# Altium PCB oxi_dev1.PcbDoc
Units mm, origin at the board's own origin, x right, y up, seen from the top; angles counter-clockwise.
Board outline 63.63 x 57.78 mm, 2 copper layers (Top Layer, Bottom Layer); 62 components, 51 nets, 264 pads, 20 vias.
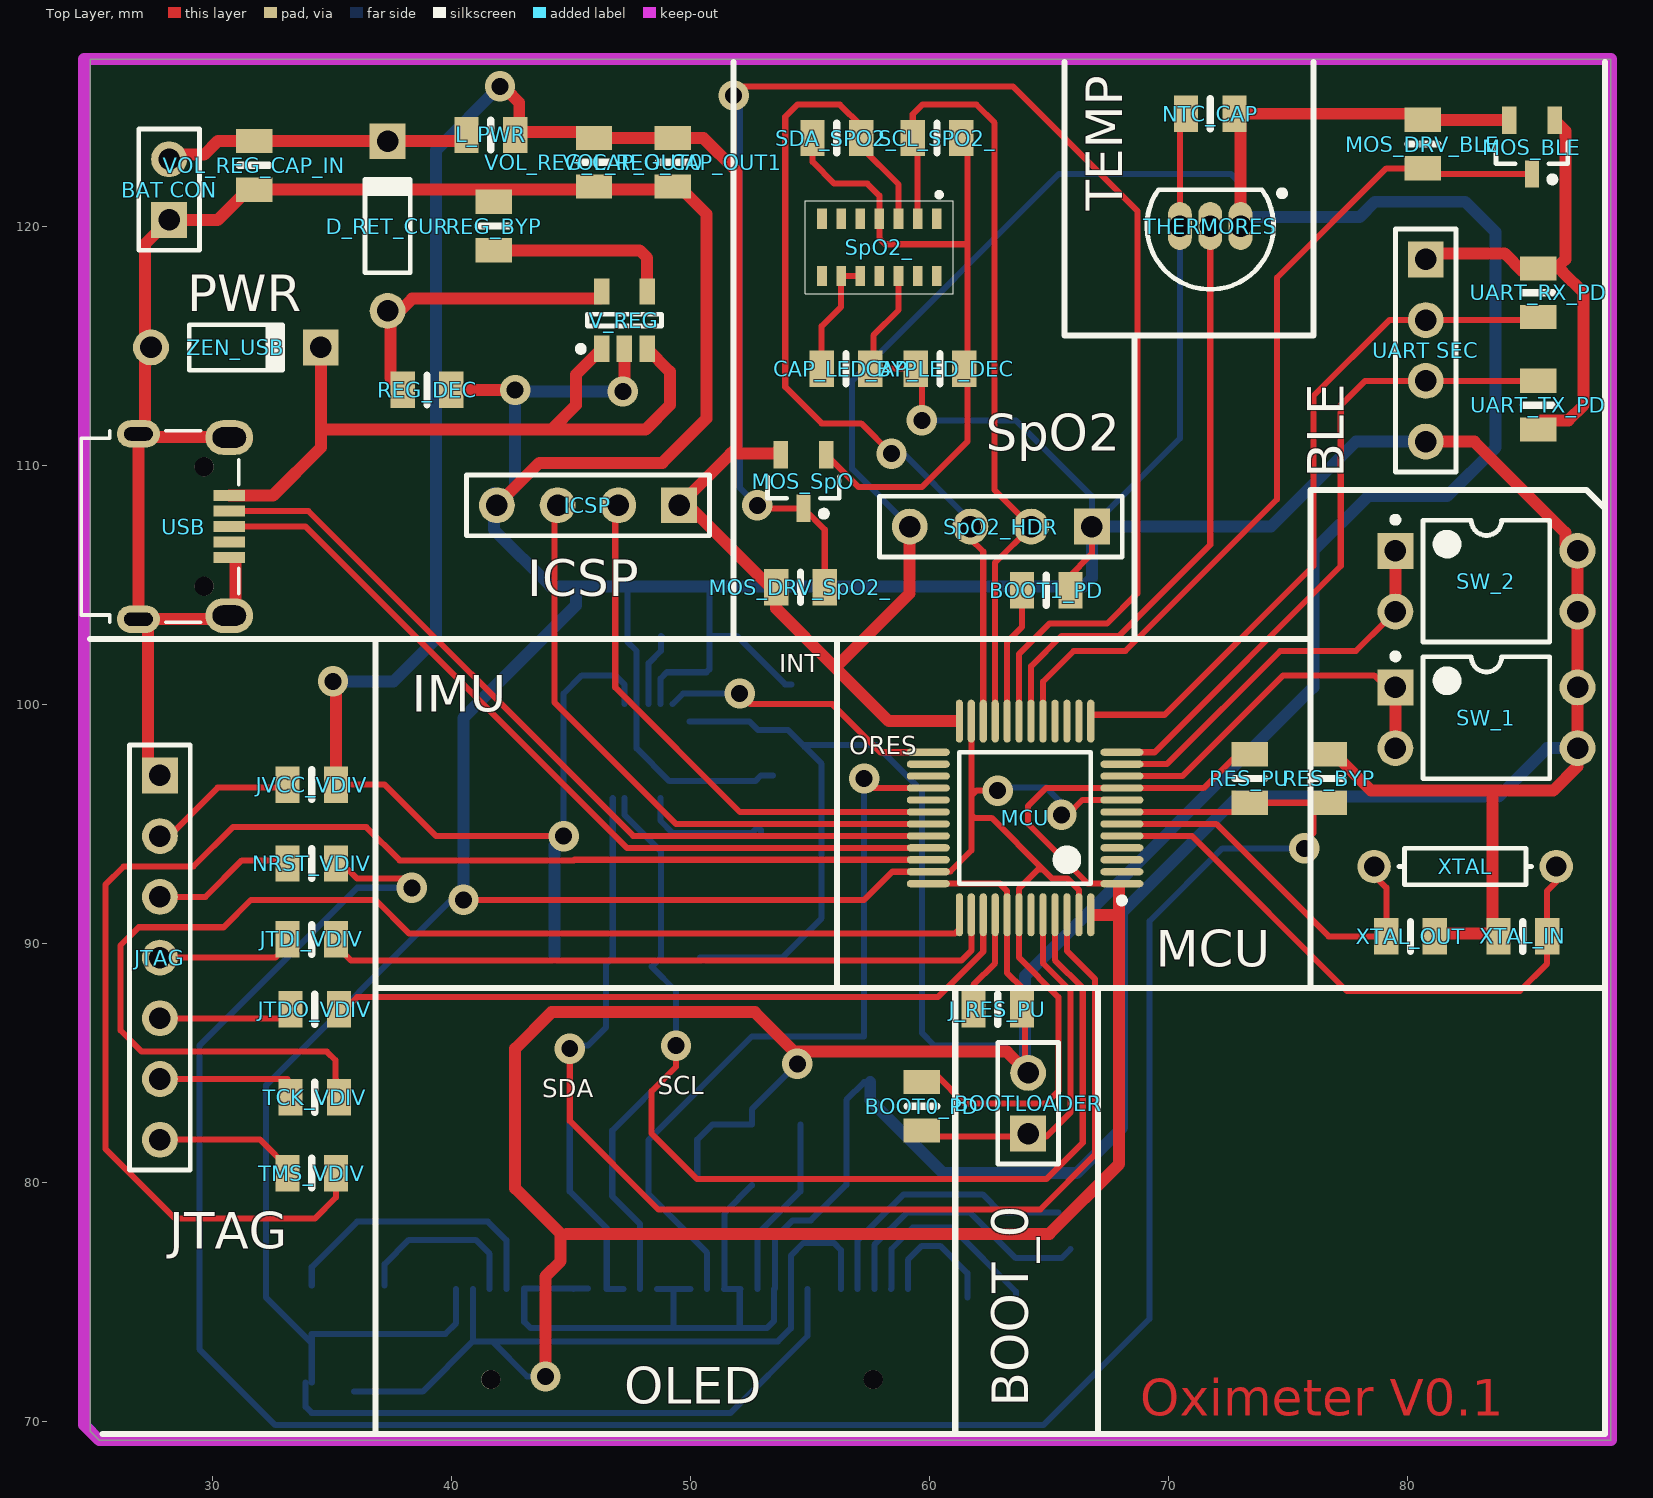
[diagram p0: Top Layer view]
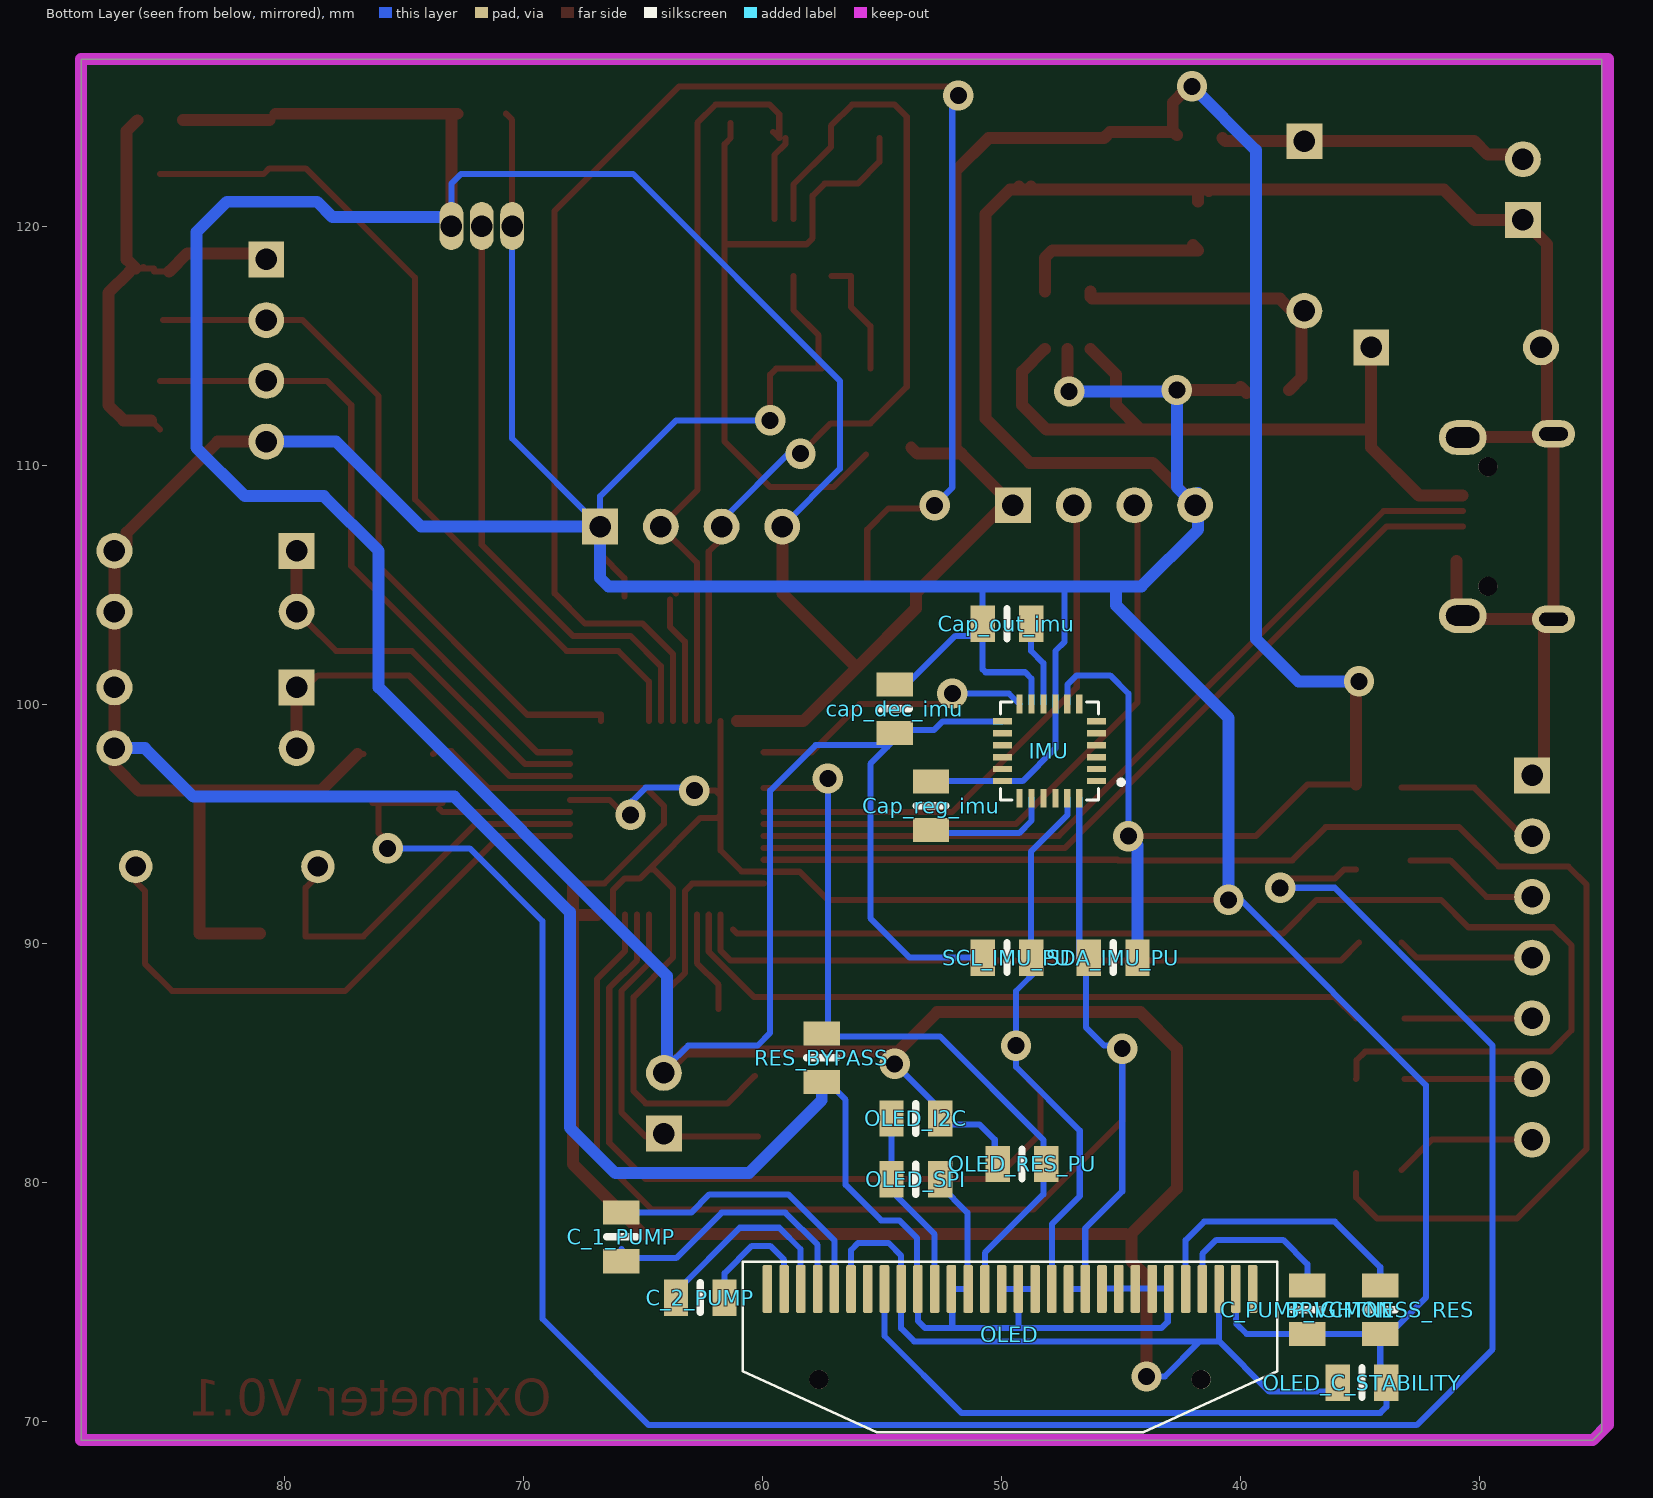
[diagram p1: Bottom Layer view, seen from below]
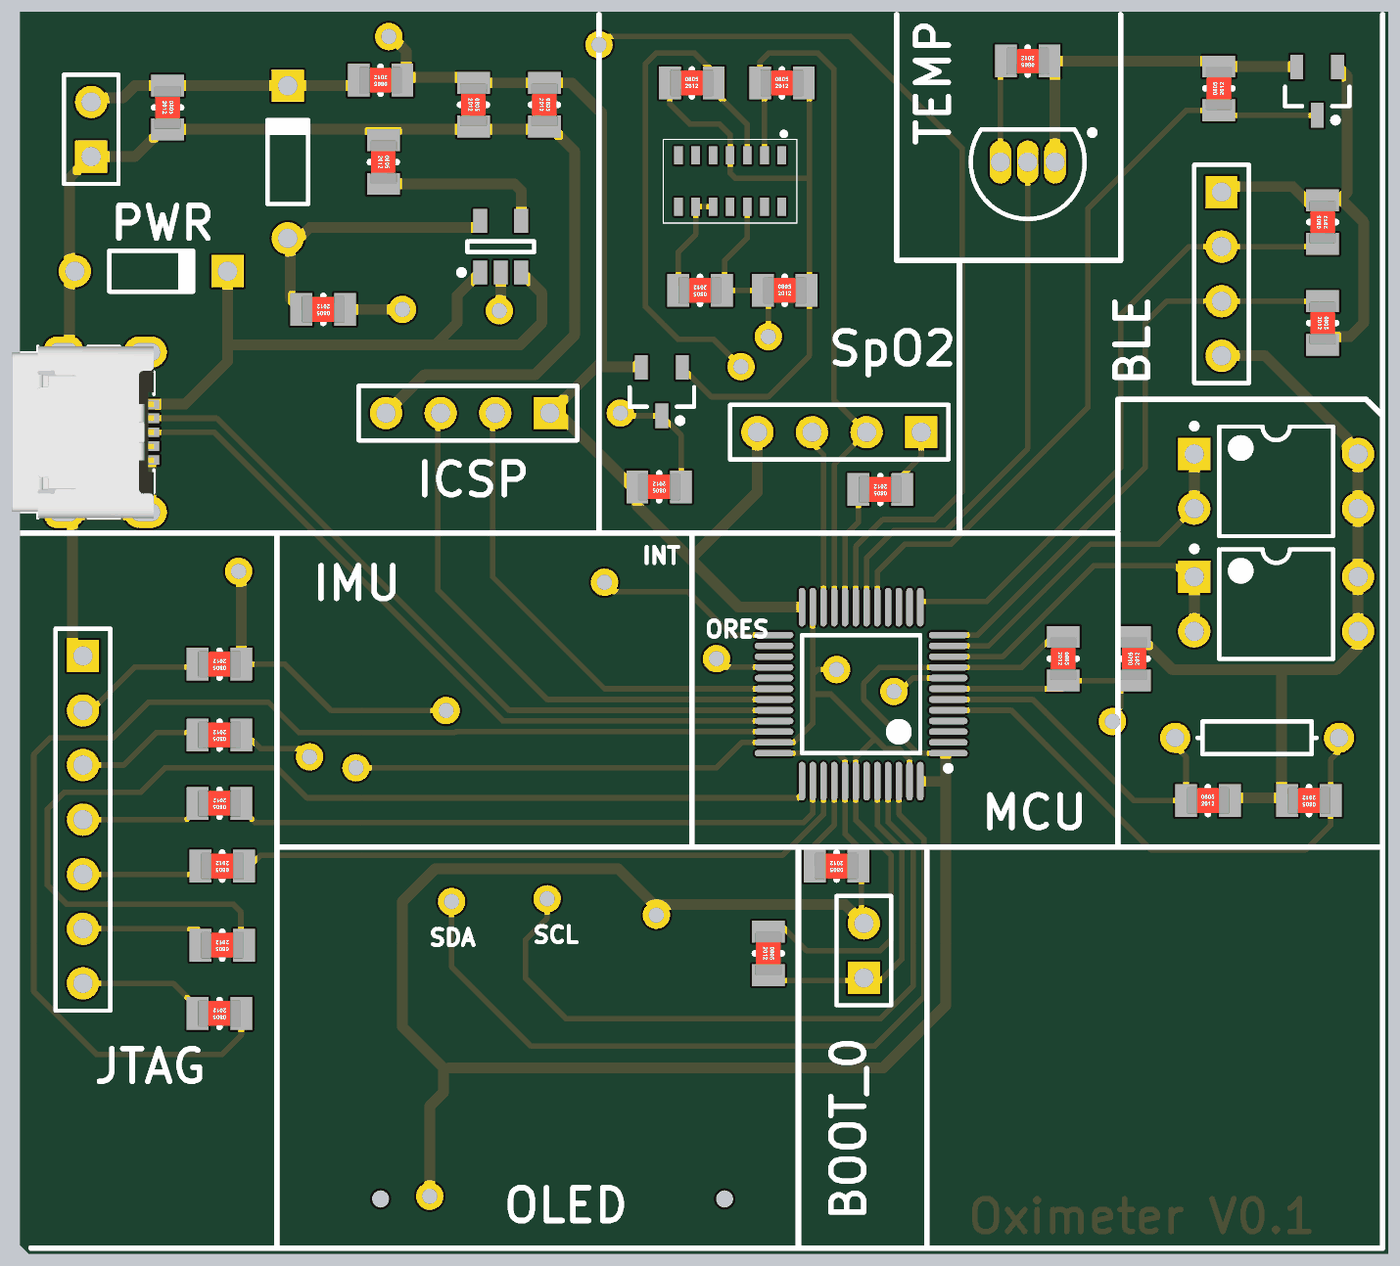
[diagram p2: 3D render of the assembled board from above, using the file's embedded part models]
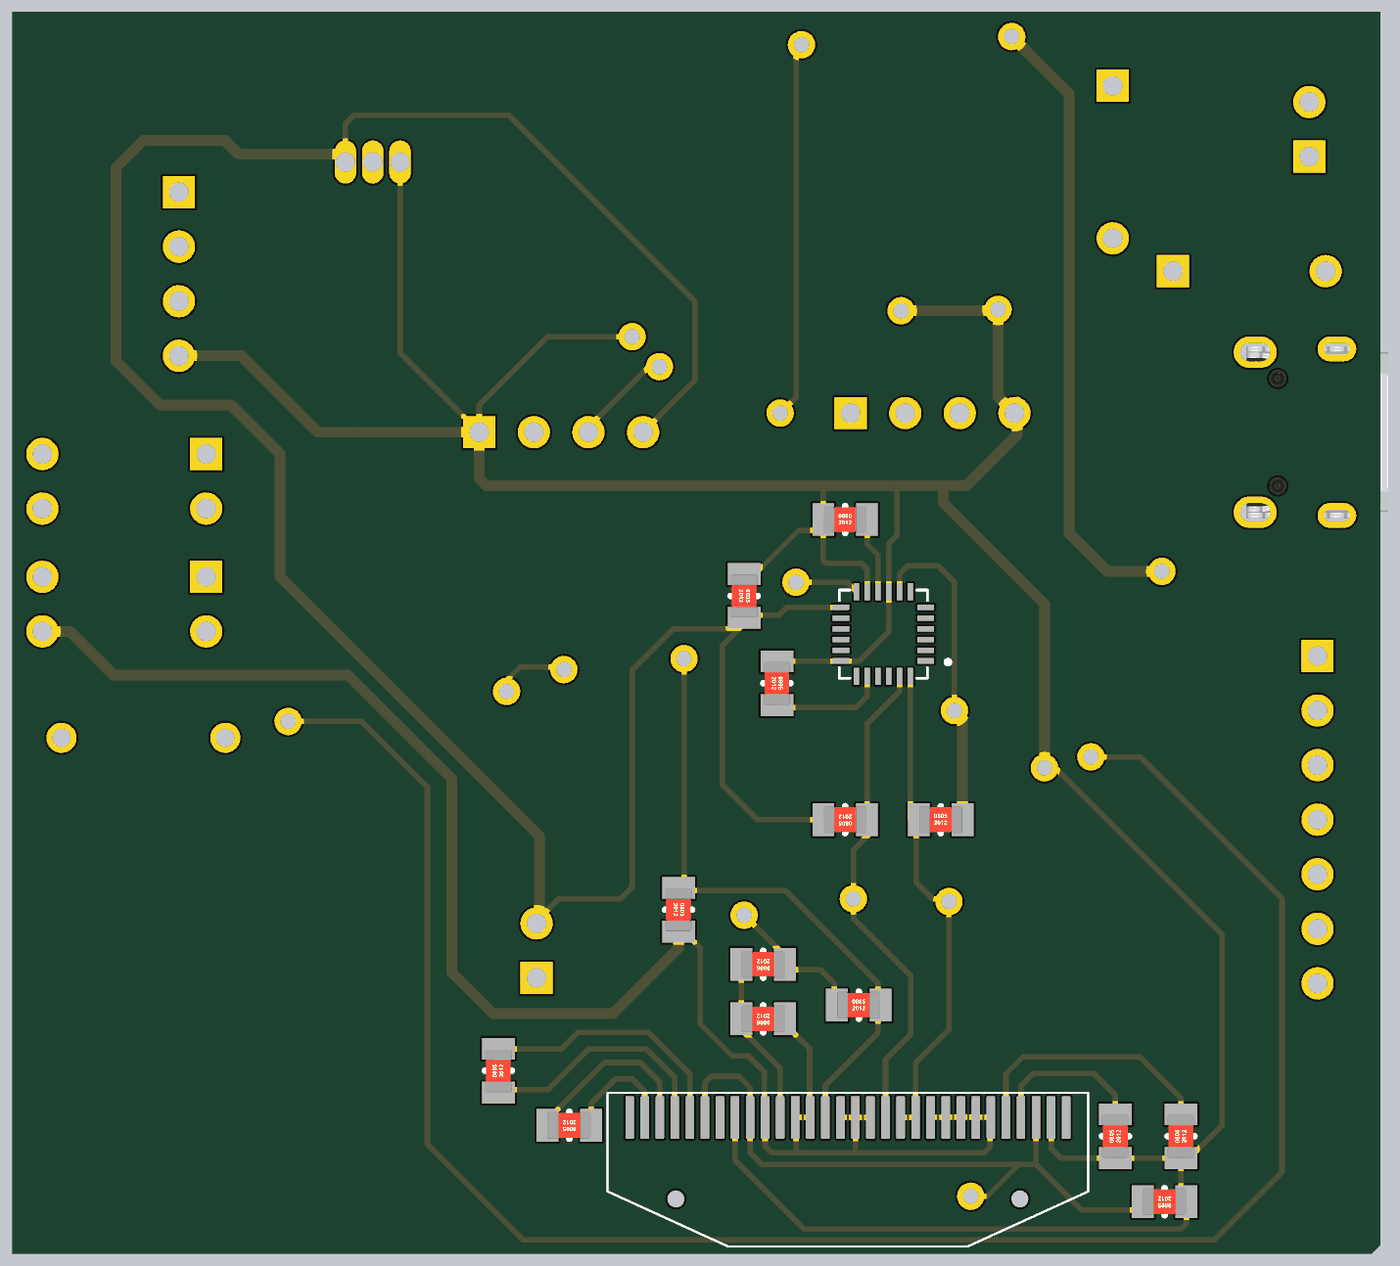
[diagram p3: 3D render of the assembled board from below, using the file's embedded part models]

## Layer stack, top to bottom
Top Solder: solder mask 0.0102, Solder Resist, Dk 3.5
Top Layer: signal copper 0.0356
Dielectric 1: dielectric 0.32, FR-4, Dk 4.8
Bottom Layer: signal copper 0.0356
Bottom Solder: solder mask 0.0102, Solder Resist, Dk 3.5

## Board outline
25.273,69.215 24.892,69.596 24.892,127 88.519,127 88.519,69.215

## Design rules (kind name [scope] priority, off if disabled: settings)
AssemblyTestPointUsage [All] p1 off:
AssemblyTestpoint [All] p1 off: testpointundercomponent=TRUE minsize=1.016 maxsize=2.54 preferedsize=1.524 minholesize=0 maxholesize=1.016 preferedholesize=0.813 testpointgrid=0.025 usegrid=TRUE gridtolerance=0 allowsidetop=TRUE allowsidebottom=TRUE
Clearance [All] p1: gap=0.254 ignorepadtopadclearanceinfootprint=FALSE except(0: Arc-Hole Track-Hole SMDPad-Hole THPad-Hole Via-Hole Fill-Hole Poly-Hole Region-Hole Text-Hole; 0.127: Arc-Arc Arc-Track Arc-SMDPad Track-Track Track-SMDPad SMDPad-SMDPad)
FabricationTestPointUsage [All] p1 off: valid=0 allowmultiple=FALSE
FabricationTestpoint [All] p1 off: side=3 testpointundercomponent=TRUE minsize=1.016 maxsize=2.54 preferedsize=1.524 minholesize=0 maxholesize=1.016 preferedholesize=0.813 testpointgrid=0.025 allowsidetop=TRUE allowsidebottom=TRUE usegrid=TRUE gridtolerance=0
HoleSize [All] p1 off: absolutevalues=TRUE maxlimit=2.54 minlimit=0.025 maxpercent=80.000 minpercent=20.000
HoleToHoleClearance [All] p1 off: gap=0.254 allowstackedmicrovias=TRUE
LayerPairs [All] p1 off: enforce=TRUE
MinimumSolderMaskSliver [All] p1 off: minsoldermaskwidth=0.254
NetAntennae [All] p1 off: netantennaetolerance=0
PolygonConnect [All] p1: connectstyle=Relief reliefconductorwidth=0.254 reliefentries=4 polygonreliefangle="90 Angle" airgapwidth=0.254
RoutingVias [All] p1: holewidth=0.711 width=1.27 viastyle="Through Hole" minholewidth=0.711 minwidth=1.27 maxholewidth=0.711 maxwidth=1.27
SilkToSilkClearance [All] p1 off: silktosilkclearance=0.254
SilkToSolderMaskClearance [IsPad] p1 off: minsilkscreentomaskgap=0.254 clearancetoexposedcopper=TRUE
SolderMaskExpansion [All] p1: expansion=0.102
Width [All] p1: maxlimit=1 minlimit=0.254 preferedwidth=0.5
19 further rules are at their usual default settings.

## Components (designator, comment, footprint, x,y, rotation, side; value= is the part's Value field where it differs from the comment)
"BAT CON" "Header 2" HDR1X2 28.194,120.269 r90 top
BOOT0_PD "10K" SMD-0805C 59.69,83.185 r180 top value=1K
BOOT1_PD "10K" SMD-0805C 64.897,104.775 r90 top value=1K
BOOTLOADER "Header 2" HDR1X2 64.135,82.042 r90 top
BRIGHTNESS_RES "Res3" SMD-0805C 34.163,74.676 r180 bottom value=390k
C_1_PUMP "Cap Semi" SMD-0805C 65.913,77.724 r180 bottom value=1uF
C_2_PUMP "Cap Semi" SMD-0805C 62.611,75.184 r90 bottom value=1uF
C_PUMP_VCMON "Cap Semi" SMD-0805C 37.211,74.676 r180 bottom value=1uF
cap_dec_imu "Cap Semi" SMD-0805C 54.483,99.822 r0 bottom value=10nF
CAP_LED_BYP "Cap Semi" SMD-0805C 56.515,114.046 r90 top value=0.1nF
CAP_LED_DEC "Cap Semi" SMD-0805C 60.452,114.046 r270 top value=10nF
Cap_out_imu "Cap Semi" SMD-0805C 49.784,103.378 r270 bottom value=0.1nF
Cap_reg_imu "Cap Semi" SMD-0805C 52.959,95.758 r0 bottom value=2.2nF
D_RET_CUR "Diode 1N4148" DO-35 37.338,120.015 r90 top
ICSP "Header 4" HDR1X4 49.53,108.331 r180 top
IMU "MPU-6050" QFN50P400X400X95-24N 48.006,98.044 r0 bottom
J_RES_PU "10k" SMD-0805C 62.865,87.249 r90 top value=1K
JTAG "Header 7" HDR1X7 27.813,97.028 r270 top
JTDI_VDIV "100" SMD-0805C 34.163,90.17 r90 top value=1K
JTDO_VDIV "100" SMD-0805C 34.29,87.249 r90 top value=1K
JVCC_VDIV "22" SMD-0805C 34.163,96.647 r90 top value=1K
L_PWR "EBLS2012-101K" SMD-0805C 41.656,123.825 r90 top
MCU "STM32F103C8T6" LQFP48_N 64.008,95.25 r180 top
MOS_BLE "FDN360P" SOT23_N 85.217,123.317 r270 top
MOS_DRV_BLE "10K" SMD-0805C 80.645,123.444 r0 top value=1K
MOS_DRV_SpO2_ "10K" SMD-0805C 54.61,104.902 r90 top value=1K
MOS_SpO "FDN360P" SOT23_N 54.737,109.329 r270 top
NRST_VDIV "100" SMD-0805C 34.163,93.345 r90 top value=1K
NTC_CAP "Cap Semi" SMD-0805C 71.755,124.714 r90 top value=10uF
OLED "OLED" OLED0.96_NO3D 59.806,75.545 r180 bottom
OLED_C_STABILITY "Cap Semi" SMD-0805C 34.925,71.628 r90 bottom value=1uF
OLED_I2C "Res3" SMD-0805C 53.594,82.677 r90 bottom value=0
OLED_RES_PU "Res3" SMD-0805C 49.149,80.772 r270 bottom value=4.7k
OLED_SPI "Res3" SMD-0805C 53.594,80.137 r90 bottom value=0
REG_BYP "1uf" SMD-0805C 41.783,120.015 r180 top
REG_DEC "2.2uf" SMD-0805C 38.989,113.157 r90 top
RES_BYP "100nF" SMD-0805C 76.708,96.901 r0 top value=100pF
RES_BYPASS "Cap Semi" SMD-0805C 57.531,85.217 r0 bottom value=10uF
RES_PU "10K" SMD-0805C 73.406,96.901 r180 top value=1K
SCL_IMU_PU "Res3" SMD-0805C 49.784,89.408 r90 bottom value=1K
SCL_SPO2_ "Res3" SMD-0805C 60.325,123.698 r270 top value=1K
SDA_IMU_PU "Res3" SMD-0805C 45.339,89.408 r270 bottom value=1K
SDA_SPO2_ "Res3" SMD-0805C 56.134,123.698 r270 top value=1K
SpO2_ "MAX30102EFD+" PSON80P330X560X165-14N 57.912,119.126 r270 top
SpO2_HDR "Header 4" HDR1X4 66.802,107.442 r180 top
SW_1 "SW DIP-2" DIP-4 83.312,99.441 r0 top
SW_2 "SW DIP-2" DIP-4 83.312,105.156 r0 top
TCK_VDIV "100" SMD-0805C 34.29,83.566 r90 top value=1K
THERMORES "MCP9700A-E/TO" TO-92-TO3 71.755,120.015 r90 top
TMS_VDIV "100" SMD-0805C 34.163,80.391 r90 top value=1K
"UART SEC" "Header 4" HDR1X4 80.772,118.618 r270 top
UART_RX_PD "Res3" SMD-0805C 85.471,117.221 r0 top value=1K
UART_TX_PD "Res3" SMD-0805C 85.471,112.522 r180 top value=1K
USB "Micro USB 2.0 Type B Receptacle" 629105150521 27.813,107.442 r270 top
V_REG "MIC5205" SOT-23-OT5_N 47.244,116.078 r90 top
VOL_REG_CAP_IN "Cap Semi" SMD-0805C 31.75,122.555 r180 top value=10uF
VOL_REG_CAP_OUT0 "Cap Semi" SMD-0805C 45.974,122.682 r180 top value=22uF
VOL_REG_CAP_OUT1 "Cap Semi" SMD-0805C 49.276,122.682 r180 top value=0.1uF
XTAL "XTAL" AXIAL-0.3 82.423,93.218 r0 top
XTAL_IN "Cap Semi" SMD-0805C 84.836,90.297 r90 top value=4.3pF
XTAL_OUT "Cap Semi" SMD-0805C 80.137,90.297 r270 top value=4.3pF
ZEN_USB "5V" DO-35 30.988,114.935 r0 top

## Footprints (in the part's own frame and the unit in brackets; to place one, negate y for a bottom-side part, rotate by r counter-clockwise, add the part's x,y. Pads: shape width x height; smd on the part's side, far side on the other; paste and mask are expansions set on the pad)
629105150521 [mm] "Micro USB 2.0 SMT Type B Horizontal 5 Contacts High Current"
  rect 0.45x1.3 smd: 1(-1.3,2.9) 2(-0.65,2.9) 3(0,2.9) 4(0.65,2.9) 5(1.3,2.9)
  round 0.8 hole 0.8 unplated: MH1(-2.5,1.85) MH2(2.5,1.85)
  oval 1.45x2 hole 0.85 slot 1.4 at 90 deg: S1(-3.725,2.9) S2(3.725,2.9)
  oval 1.15x1.8 hole 0.55 slot 1.2 at 90 deg: S3(-3.875,-0.9) S4(3.875,-0.9)
  silkscreen extent -4,-3.3 4,3.3, body extent -4,-3.3 4,3.3, height 2.75
AXIAL-0.3 [mm] "Axial Device, Thru-Hole; 2 Leads; 0.3 in Pin Spacing"
  round 1.4 hole 0.85: 1(-3.81,0) 2(3.81,0)
  silkscreen extent -2.77,-0.76 2.77,0.76
DIP-4 [mm] "DIP; 4 Leads; Row Spacing 7.62 mm; Pitch 2.54 mm"
  rect 1.5x1.5 hole 0.9: 1(-3.81,1.27)
  round 1.5 hole 0.9: 2(-3.81,-1.27) 3(3.81,-1.27) 4(3.81,1.27)
  silkscreen extent -3.93,-2.55 2.65,2.69, body extent -3.15,-2.5 3.15,2.5, height 5.6
DO-35 [mm] "Diode, Axial; Body 3.8 x 1.9 mm (LxDia. max), Lead Dia. 0.53 mm (max)"
  round 1.5 hole 0.9: 1(-3.55,0)
  rect 1.5x1.5 hole 0.9: 2(3.55,0)
  silkscreen extent -1.95,-0.95 2.05,0.95
HDR1X2 [mm] "Connector; Header; 2 Position"
  rect 1.5x1.5 hole 0.9: 1(0,0)
  round 1.5 hole 0.9: 2(2.54,0)
  silkscreen extent -1.27,-1.27 3.81,1.27
HDR1X4 [mm] "Connector; Header; 4 Position"
  rect 1.5x1.5 hole 0.9: 1(0,0)
  round 1.5 hole 0.9: 2(2.54,0) 3(5.08,0) 4(7.62,0)
  silkscreen extent -1.27,-1.27 8.89,1.27
HDR1X7 [mm] "Connector; Header; 7 Position"
  rect 1.5x1.5 hole 0.9: 1(0,0)
  round 1.5 hole 0.9: 2(2.54,0) 3(5.08,0) 4(7.62,0) 5(10.16,0) 6(12.7,0) 7(15.24,0)
  silkscreen extent -1.27,-1.27 16.51,1.27
LQFP48_N [mm] "Thin QFP, 48-Leads, Body 7x7mm, Pitch 0.5mm, IPC Medium Density"
  oval 1.8x0.3 smd: 1(-4.05,2.75) 2(-4.05,2.25) 3(-4.05,1.75) 4(-4.05,1.25) 5(-4.05,0.75) 6(-4.05,0.25) 7(-4.05,-0.25) 8(-4.05,-0.75) 9(-4.05,-1.25) 10(-4.05,-1.75) 11(-4.05,-2.25) 12(-4.05,-2.75) 25(4.05,-2.75) 26(4.05,-2.25) 27(4.05,-1.75) 28(4.05,-1.25) 29(4.05,-0.75) 30(4.05,-0.25) 31(4.05,0.25) 32(4.05,0.75) 33(4.05,1.25) 34(4.05,1.75) 35(4.05,2.25) 36(4.05,2.75)
  oval 0.3x1.8 smd: 13(-2.75,-4.05) 14(-2.25,-4.05) 15(-1.75,-4.05) 16(-1.25,-4.05) 17(-0.75,-4.05) 18(-0.25,-4.05) 19(0.25,-4.05) 20(0.75,-4.05) 21(1.25,-4.05) 22(1.75,-4.05) 23(2.25,-4.05) 24(2.75,-4.05) 37(2.75,4.05) 38(2.25,4.05) 39(1.75,4.05) 40(1.25,4.05) 41(0.75,4.05) 42(0.25,4.05) 43(-0.25,4.05) 44(-0.75,4.05) 45(-1.25,4.05) 46(-1.75,4.05) 47(-2.25,4.05) 48(-2.75,4.05)
  silkscreen extent -4.18,-2.75 2.75,3.57, body extent -3.5,-3.5 3.5,3.5, height 1.6
OLED0.96_NO3D [mm]
  round 0.8 hole 0.8 unplated: 0(2.15,-3.79) 0(18.15,-3.79)
  rrect30% 0.4x2 smd: 1(0,0) 2(0.7,0) 3(1.4,0) 4(2.1,0) 5(2.8,0) 6(3.5,0) 7(4.2,0) 8(4.9,0) 9(5.6,0) 10(6.3,0) 11(7,0) 12(7.7,0) 13(8.4,0) 14(9.1,0) 15(9.8,0) 16(10.5,0) 17(11.2,0) 18(11.9,0) 19(12.6,0) 20(13.3,0) 21(14,0) 22(14.7,0) 23(15.4,0) 24(16.1,0) 25(16.8,0) 26(17.5,0) 27(18.2,0) 28(18.9,0) 29(19.6,0) 30(20.3,0)
  silkscreen extent -1.03,-6 21.33,1.14
PSON80P330X560X165-14N [mm]
  rect 0.84x0.4 smd: 1(-1.195,2.4) 2(-1.195,1.6) 3(-1.195,0.8) 4(-1.195,0) 5(-1.195,-0.8) 6(-1.195,-1.6) 7(-1.195,-2.4) 8(1.195,-2.4) 9(1.195,-1.6) 10(1.195,-0.8) 11(1.195,0) 12(1.195,0.8) 13(1.195,1.6) 14(1.195,2.4)
  silkscreen extent -2.3,-3.1 1.95,3.1
QFN50P400X400X95-24N [mm]
  rect 0.79x0.26 smd: 1(-1.97,1.25) 2(-1.97,0.75) 3(-1.97,0.25) 4(-1.97,-0.25) 5(-1.97,-0.75) 6(-1.97,-1.25) 13(1.97,-1.25) 14(1.97,-0.75) 15(1.97,-0.25) 16(1.97,0.25) 17(1.97,0.75) 18(1.97,1.25)
  rect 0.26x0.79 smd: 7(-1.25,-1.97) 8(-0.75,-1.97) 9(-0.25,-1.97) 10(0.25,-1.97) 11(0.75,-1.97) 12(1.25,-1.97) 19(1.25,1.97) 20(0.75,1.97) 21(0.25,1.97) 22(-0.25,1.97) 23(-0.75,1.97) 24(-1.25,1.97)
  silkscreen extent -3.1,-2.05 2.05,2.05
SMD-0805C [mil]
  rect 60x40 smd: 1(0,40) 2(0,-40)
  silkscreen extent -25,0 25,0, body extent -25,-39 25,39, height 35
SOT23_N [mm] "SOT23, 3-Leads, Body 2.9x1.3mm, Pitch 0.95mm, Lead Span 2.3mm - Reverse Pinning, IPC Medium Density"
  rect 1.15x0.6 smd: 1(1.125,0) 2(-1.125,-0.95) 3(-1.125,0.95)
  silkscreen extent -0.2,-1.5 1.47,1.5, body extent -0.7,-1.5 0.7,1.5, height 1.1
SOT-23-OT5_N [mm] "SOT23, 5-Leads, Body 2.9x1.6mm, Pitch 0.95mm, Lead Span 2.7mm, IPC Medium Density"
  rect 1.1x0.65 smd: 1(-1.2,0.95) 2(-1.2,0) 3(-1.2,-0.95) 4(1.2,-0.95) 5(1.2,0.95)
  silkscreen extent -1.32,-1.55 0.25,1.95, body extent -0.9,-1.55 0.9,1.55, height 1.45
TO-92-TO3 [mm] "TO, Flat Index; 3 In-Line, Axial Leads; Body Dia. 4.8mm; Leads 0.56 x 0.53 mm (max)"
  oval 2x1 hole 0.9: 1(0,-1.27) 2(0,0) 3(0,1.27)
  silkscreen extent -2.65,-3.13 1.52,2.65, body extent -2.65,-2.66 1.52,2.66, height 5.33

## Part data
"BAT CON" BOOTLOADER: "Header, 2-Pin", LatestRevisionDate=17-Jul-2002, LatestRevisionNote="Re-released for DXP Platform.", Publisher="Altium Limited"
BOOT0_PD BOOT1_PD J_RES_PU JTDI_VDIV JTDO_VDIV JVCC_VDIV NRST_VDIV TCK_VDIV TMS_VDIV: library part Res1, "Resistor", Published=8-Jun-2000, Publisher="Altium Limited", Revision="July-2002: Re-released for DXP Platform."
BRIGHTNESS_RES OLED_I2C OLED_RES_PU OLED_SPI SCL_IMU_PU SCL_SPO2_ SDA_IMU_PU SDA_SPO2_ UART_RX_PD UART_TX_PD: "Resistor", LatestRevisionDate=29-May-2009, LatestRevisionNote="IPC-7351 Footprint Added.", PackageDescription="Chip Resistor", PackageReference=J1-0603, Published=8-Jun-2000, Publisher="Altium Limited"
C_1_PUMP C_2_PUMP C_PUMP_VCMON cap_dec_imu CAP_LED_BYP CAP_LED_DEC Cap_out_imu Cap_reg_imu NTC_CAP OLED_C_STABILITY RES_BYPASS VOL_REG_CAP_IN VOL_REG_CAP_OUT0 VOL_REG_CAP_OUT1 XTAL_IN XTAL_OUT: "Capacitor (Semiconductor SIM Model)", LatestRevisionDate=29-May-2009, LatestRevisionNote="IPC-7351 Footprint Added.", PackageDescription="Chip Capacitor", PackageReference=C1206, Published=8-Jun-2000, Publisher="Altium Limited"
D_RET_CUR: "High Conductance Fast Diode", Code_JEDEC=DO-204-AH, ComponentLink1Description="Manufacturer Link", ComponentLink1URL=http://www.fairchildsemi.com/, ComponentLink2Description=Datasheet, ComponentLink2URL=http://www.fairchildsemi.com/ds/1N%2F1N4148.pdf, DatasheetVersion=1997, LatestRevisionDate=17-Jul-2002, LatestRevisionNote="Re-released for DXP Platform.", PackageDescription="Diode, Axial; Body 3.8 x 1.9 mm (LxDia. max), Lead Dia. 0.53 mm (max)", PackageReference=DO-35, Published=8-Jun-2000, Publisher="Altium Limited"
ICSP SpO2_HDR "UART SEC": "Header, 4-Pin", LatestRevisionDate=17-Jul-2002, LatestRevisionNote="Re-released for DXP Platform.", Publisher="Altium Limited"
IMU: "Accelerometer, Gyroscope, 6 Axis Sensor IA²C Output", Package="VFQFN-24 TDK InvenSense", Availability=Unavailable, MF="TDK InvenSense", MP=MPU-6050, Price=None, SnapEDA_Link=https://www.snapeda.com/parts/MPU-6050/TDK%20InvenSense/view-part/4503180/?ref=snap
JTAG: "Header, 7-Pin", LatestRevisionDate=17-Jul-2002, LatestRevisionNote="Re-released for DXP Platform.", Publisher="Altium Limited"
L_PWR: library part INDUCTOR, "Inductor 100UH (0805)", GLFR1608T100M-LR=10UH
MCU: "STM32 ARM-based 32-bit MCU with 64 Kbytes Flash, 48-pin LQFP, Industrial Temperature", ComponentLink1Description="Manufacturer Link", ComponentLink1URL=www.st.com/stm32, ComponentLink2Description=Datasheet, ComponentLink2URL=http://www.st.com/stonline/products/literature/ds/13587.pdf, DatasheetVersion="rev6, Mar-2008", PackageDescription="48-Pin Low-Profile Quad Flat Pack, 7 x 7 mm Body, 0.5 mm Pitch (LQFP48)", PackageReference=LQFP48, PackageVersion=Mar-2008, Published=30-May-2008, Publisher="Altium Limited"
MOS_BLE MOS_SpO: library part MOSFET-P, "P-Channel MOSFET", LatestRevisionDate=17-Jul-2002, LatestRevisionNote="Re-released for DXP Platform.", PackageDescription="TO, Flat Index; 3 In-Line, Axial Leads; Body Dia. 4.6mm; Lead Dia. 0.5 mm (max)", PackageReference=E3, PackageVersion=1995/1996, Published=8-Jun-2000, Publisher="Altium Limited"
MOS_DRV_BLE MOS_DRV_SpO2_ RES_PU: library part res1, "Resistor", Published=8-Jun-2000, Publisher="Altium Limited", Revision="July-2002: Re-released for DXP Platform."
OLED: library part OLED0.96
REG_BYP REG_DEC RES_BYP: library part CAP, "Capacitor"
  RES_BYP: Published=8-Jun-2000, Publisher="Altium Limited", Revision="July-2002: Re-released for DXP Platform."
SpO2_: "Oximeter/Heart Rate Sensor IA²C Output", Package="OLGA-14 Maxim", Availability=Unavailable, MF="Maxim Integrated", MP=MAX30102EFD+, Price=None, SnapEDA_Link=https://www.snapeda.com/parts/MAX30102EFD%2B/Maxim%20Integrated/view-part/397548/?ref=snap
SW_1 SW_2: "DIP Switch, 2 Position, SPST", LatestRevisionDate=17-Jul-2002, LatestRevisionNote="Re-released for DXP Platform.", PackageReference=DIP-4, Published=24-Mar-1999, Publisher="Altium Limited"
THERMORES: "Low-Power Linear Active Thermistor IC, 3-Pin TO-92, Extended Temperature", Supplier Part Number 1=MCP9700A-E/TO-ND, ComponentLink1Description=Datasheet, ComponentLink1URL=http://ww1.microchip.com/downloads/en/DeviceDoc/21942e.pdf, ComponentLink2Description="Packaging Specification", ComponentLink2URL=http://www.microchip.com/stellent/groups/techpub_sg/documents/packagingspec/en012702.pdf, ComponentLink3Description="Microchip.com Home", ComponentLink3URL=http://www.microchip.com/, DatasheetVersion="revE, Apr-2009", LatestRevisionDate=02-Dec-2009, LatestRevisionNote="Updated datasheet to version revE, Apr-2009.", PackageDescription="3-Lead Plastic Transistor Outline (TO) [TO-92]", PackageReference=TO-92-TO3, PackageVersion="revBB, Aug-2009", Published=29-Jan-2009, Publisher="Altium Limited", Supplier 1=Digi-Key, Supplier 2=Farnell, Supplier Part Number 2=1332164
USB: library part 629105150521, "Micro USB 2.0 Type B, Receptacle, Horizontal, SMT, with Pegs", Operating Temperature="-40 to +85degC", Rated Current=3A, Working Voltage=30VAC, Application="Micro USB 2.0", ComponentLink1Description=Manufacturer, ComponentLink1URL=http://www.we-online.de, ComponentLink2Description=Datasheet, ComponentLink2URL=https://katalog.we-online.com/em/datasheet/629105150521.pdf, Gender=Receptacle, Interface Type="Type B", Mounting Technology=SMT, Packaging="Tape and Reel", Part Number=629105150521, Pin Number=5, Published Date="September 2019", Publisher="Wurth Elektronik", Type=Horizontal
V_REG: "150mA Low-Noise LDO Regulator"
XTAL: "Crystal Oscillator", LatestRevisionDate=17-Jul-2002, LatestRevisionNote="Re-released for DXP Platform.", PackageDescription="Crystal, Thru-Hole; 2 Leads; Body 3.1 x 8.2 mm (Dia.xH)", PackageReference=R38, Published=8-Jun-2000, Publisher="Altium Limited"
ZEN_USB: library part ZENER

## Via types
v1: diameter 1.27, hole 0.711, Top Layer to Bottom Layer, 12 vias
v2: diameter 1.27/1.27 (per signal layer), hole 0.711, Top Layer to Bottom Layer, 8 vias

## Nets (pads, with @x,y where several pads share a name; then routed paths per layer and width w, separated by ;. In a path a pad name is that pad's centre, name@x,y a point inside that pad or via, vN(x,y) a via of type N, cw(c..) or ccw(c..) an arc to the next point about the centre after c; other vN are vias at no path point)
ADC_NTC: MCU.18 THERMORES.2 | length 25.2
  Top Layer w0.254: MCU.18 64.258,101.596 65.532,102.87 67.945,102.87 71.755,106.68 THERMORES.2
BAT+: "BAT CON.2" D_RET_CUR.2 L_PWR.1 VOL_REG_CAP_IN.2 | length 12.9
  Top Layer w0.5: 28.194,122.809 28.385,123 29.662,123 30.232,123.571 VOL_REG_CAP_IN.2 40.64,123.571 L_PWR.1@40.767,123.698
BOOT0: BOOT0_PD.1 BOOTLOADER.1 MCU.44 | length 14.9
  Top Layer w0.254: BOOT0_PD.1@60.198,81.915 64.897,81.915 65.913,82.931 65.913,88.011 64.758,89.166 MCU.44
BOOT1: BOOT1_PD.1 MCU.20 | length 5.5
  Top Layer w0.254: MCU.20 63.258,102.628 63.881,103.251 BOOT1_PD.1@63.881,104.394 ; BOOT1_PD.1@63.627,104.648 BOOT1_PD.1@63.754,104.775
CPU_R\E\S\E\T_Con\: JTAG.3 NRST_VDIV.1 | length 5.7
  Top Layer w0.254: JTAG.3 29.718,91.948 31.242,93.472 NRST_VDIV.1@32.893,93.472
GND: "BAT CON.1" "UART SEC.4" BOOT0_PD.2 BOOT1_PD.2 BRIGHTNESS_RES.2 C_PUMP_VCMON.2 cap_dec_imu.2 CAP_LED_BYP.2 CAP_LED_DEC.2 Cap_out_imu.2 Cap_reg_imu.2 ICSP.4 IMU.9 IMU.11 IMU.18 JTAG.1 MCU.8 MCU.23 MCU.35 MCU.42 MCU.47 NTC_CAP.1 OLED.8 OLED.10 OLED.12 OLED.13 OLED.15 OLED.16 OLED.17 OLED.21 OLED.22 OLED.23 OLED.24 OLED.25 OLED.29 OLED_C_STABILITY.2 OLED_SPI.2 REG_BYP.2 REG_DEC.2 RES_BYP.1 RES_BYPASS.1 SpO2_.12 SpO2_HDR.1 SW_1.3 SW_1.4 SW_2.3 SW_2.4 THERMORES.3 USB.5 USB.S1 USB.S2 USB.S3 USB.S4 V_REG.2 VOL_REG_CAP_IN.1 VOL_REG_CAP_OUT0.1 VOL_REG_CAP_OUT1.1 XTAL_IN.1 XTAL_OUT.1 ZEN_USB.1 | length 452.6
  Top Layer w0.254: v2(40.513,91.821) 57.277,91.821 58.456,93 MCU.35 59.967,93.009 60.878,93.009 61.758,93.889 61.758,95.377 ; SpO2_.12 58.712,116.497 57.658,115.443 57.658,114.173 CAP_LED_BYP.2 CAP_LED_DEC.2 59.69,113.792 v2(59.69,111.887) ; BOOT0_PD.2@60.325,84.455 61.468,83.312 64.897,83.312 65.405,83.82 65.405,87.757 63.758,89.404 MCU.42 63.758,92.307 64.542,93.091 64.766,93.091 ; MCU.23 61.758,96.175 ; v1(62.865,96.393) 61.976,96.393 61.758,96.175 ; v1(65.532,95.377) 65.786,95.377 66.409,96 MCU.8 ; BOOT1_PD.2@65.786,104.521 65.786,105.283 66.802,106.299 SpO2_HDR.1 SpO2_HDR.1@67.31,107.95 ; MCU.47 66.258,92.238 65.786,92.71 65.147,92.71 64.766,93.091 ; THERMORES.3 70.485,124.46 NTC_CAP.1 ; RES_BYP.1 RES_BYP.1@76.962,97.917 ; 61.758,95.377 61.758,96.175 ; 61.758,95.377 61.885,95.25 62.607,95.25 64.766,93.091
  Top Layer w0.5: USB.S4 USB.S3 ; USB.S4@27.178,103.629 27.313,103.494 27.313,97.528 JTAG.1 ; USB.S3@27.178,111.379 27.178,119.253 28.194,120.269 30.226,120.269 31.496,121.539 VOL_REG_CAP_IN.1 41.402,121.539 ; USB.S4@27.739,103.58 31.389,103.58 30.977,103.992 USB.5@30.977,106.001 ; USB.S3@27.739,111.18 31.389,111.18 USB.S1@31.464,111.105 ; REG_DEC.2@39.751,113.03 40.005,113.284 REG_DEC.2 v1(42.672,113.157) ; REG_BYP.2@41.338,121.475 41.402,121.539 ; REG_BYP.2 41.783,121.539 ; ICSP.4 43.688,110.109 48.83,110.109 50.673,111.952 50.673,120.523 49.657,121.539 VOL_REG_CAP_OUT1.1@49.149,121.539 ; v1(47.18,113.093) 47.244,113.157 V_REG.2 ; VOL_REG_CAP_OUT1.1@48.768,121.666 VOL_REG_CAP_OUT1.1@48.895,121.539 ; VOL_REG_CAP_OUT1.1 VOL_REG_CAP_OUT1.1@49.149,121.539 ; RES_BYP.1@76.962,97.917 78.486,96.393 83.566,96.393 ; 80.772,110.998 82.804,110.998 86.614,107.188 SW_2.4@86.614,106.68 ; XTAL_OUT.1@81.026,90.424 83.566,90.424 83.566,96.393 ; SW_2.4 SW_2.3 SW_1.4 SW_1.3 87.122,97.409 86.106,96.393 83.566,96.393 ; SW_2.3@87.376,104.14 SW_2.3@87.63,103.886 ; 41.402,121.539 41.783,121.539 ; 41.783,121.539 VOL_REG_CAP_OUT1.1@48.895,121.539 ; VOL_REG_CAP_OUT1.1@48.895,121.539 VOL_REG_CAP_OUT1.1@49.149,121.539
  Bottom Layer w0.254: OLED_C_STABILITY.2 33.909,70.612 34.163,70.358 51.689,70.358 54.906,73.575 OLED.8 ; OLED_C_STABILITY.2@34.163,71.628 BRIGHTNESS_RES.2@34.163,73.279 ; v2@40.005,91.821 32.258,84.074 32.258,75.184 BRIGHTNESS_RES.2@34.163,73.279 ; OLED.29 40.206,74.115 39.751,73.66 C_PUMP_VCMON.2 BRIGHTNESS_RES.2 BRIGHTNESS_RES.2@34.163,73.279 ; OLED.22 OLED.22@45.106,75.565 ; OLED.21@45.711,75.565 OLED.22@45.106,75.565 ; 47.371,104.942 47.371,102.62 47.756,102.235 IMU.9 47.756,98.167 49.129,96.794 IMU.18 52.725,96.794 52.959,97.028 Cap_reg_imu.2@53.467,97.028 ; 47.665,104.942 47.756,105.033 47.756,104.942 ; OLED.17 OLED.16 ; IMU.11 48.756,101.08 49.022,101.346 50.673,101.346 50.8,101.473 Cap_out_imu.2@50.8,102.87 ; 49.316,104.942 49.34,104.965 49.363,104.942 ; OLED.15 OLED.16 ; 50.8,104.775 Cap_out_imu.2 Cap_out_imu.2@50.8,102.87 ; OLED_SPI.2@52.578,79.883 51.435,78.74 51.435,75.574 OLED.13 OLED.12 52.07,75.509 52.07,73.914 ; OLED.10 53.506,74.207 53.213,73.914 52.07,73.914 ; OLED.10@53.538,75.565 53.538,77.668 54.282,78.412 55.044,78.412 56.533,79.901 56.533,83.457 57.277,84.201 RES_BYPASS.1 ; cap_dec_imu.2@54.229,100.838 53.975,100.838 51.943,102.87 Cap_out_imu.2@50.8,102.87 ; v2(59.69,111.887) 63.627,111.887 66.802,108.712 SpO2_HDR.1 70.485,111.125 THERMORES.3 ; v1(62.865,96.393) 62.992,96.52 64.897,96.52 65.913,95.504 65.786,95.377 v1(65.532,95.377) ; OLED.22@45.106,75.565 43.053,75.565 43.053,74.168 43.307,73.914 49.306,73.914 ; 49.306,73.914 52.07,73.914 ; 49.306,73.914 OLED.16
  Bottom Layer w0.5: v2(40.513,91.821) 40.513,99.441 45.212,104.14 45.212,104.942 ; ICSP.4@41.783,108.839 41.783,107.315 44.156,104.942 45.212,104.942 ; ICSP.4 42.672,109.093 v1(42.672,113.157) 42.735,113.093 v1(47.18,113.093) ; 47.665,104.942 47.371,104.942 45.212,104.942 ; 47.756,104.942 49.316,104.942 ; 49.363,104.942 66.461,104.942 66.802,105.283 SpO2_HDR.1 74.295,107.442 77.851,110.998 80.772,110.998 ; RES_BYPASS.1 57.531,83.439 60.579,80.391 66.167,80.391 68.072,82.296 68.072,91.313 72.898,96.139 83.82,96.139 85.852,98.171 SW_1.3
INT_IMU: IMU.12 MCU.25 | length 11.7
  Top Layer w0.254: v1@52.197,100.33 52.513,100.014 55.942,100.014 57.956,98 MCU.25
  Bottom Layer w0.254: IMU.12 49.699,100.457 v1(52.07,100.457)
JNTRST: J_RES_PU.1 MCU.40 | length 4.3
  Top Layer w0.254: J_RES_PU.1 61.849,88.265 62.758,89.174 MCU.40
JTDO: JTDO_VDIV.2 MCU.39 | length 29.8
  Top Layer w0.254: JTDO_VDIV.2@35.179,86.868 36.068,87.757 60.356,87.757 62.258,89.659 MCU.39
JTDO_Con: JTAG.5 JTDO_VDIV.1 | length 5.3
  Top Layer w0.254: JTAG.5 JTDO_VDIV.1@33.147,86.868
NetBRIGHTNESS_RES_1: BRIGHTNESS_RES.1 OLED.26 | length 12.1
  Bottom Layer w0.254: BRIGHTNESS_RES.1 34.163,76.454 36.068,78.359 41.529,78.359 42.306,77.582 OLED.26
NetC_1_PUMP_1: C_1_PUMP.1 OLED.5 | length 11.5
  Bottom Layer w0.254: OLED.5 57.006,77.58 58.928,79.502 62.23,79.502 62.992,78.74 C_1_PUMP.1@65.405,78.74
NetC_1_PUMP_2: C_1_PUMP.2 OLED.4 | length 11.6
  Bottom Layer w0.254: OLED.4 57.706,77.391 59.055,78.74 61.722,78.74 63.627,76.835 65.532,76.835 65.913,77.216
NetC_2_PUMP_1: C_2_PUMP.1 OLED.3 | length 8.6
  Bottom Layer w0.254: OLED.3 58.42,75.559 58.42,77.216 59.309,78.105 60.96,78.105 63.627,75.438 C_2_PUMP.1
NetC_2_PUMP_2: C_2_PUMP.2 OLED.2 | length 5.4
  Bottom Layer w0.254: OLED.2 59.106,76.759 59.69,77.343 60.452,77.343 61.595,76.2 C_2_PUMP.2
NetC_PUMP_VCMON_1: C_PUMP_VCMON.1 OLED.27 | length 7.4
  Bottom Layer w0.254: C_PUMP_VCMON.1 37.211,76.581 38.227,77.597 41.021,77.597 41.606,77.012 OLED.27
NetCAP_LED_BYP_1: CAP_LED_BYP.1 SpO2_.9 SpO2_.10 | length 5
  Top Layer w0.254: CAP_LED_BYP.1 55.499,115.824 56.312,116.637 SpO2_.9 SpO2_.10
NetCap_out_imu_1: Cap_out_imu.1 IMU.10 | length 3.4
  Bottom Layer w0.254: IMU.10 48.256,101.723 48.768,102.235 Cap_out_imu.1@48.768,102.743 ; Cap_out_imu.1@48.641,102.743 Cap_out_imu.1@48.768,102.743 ; Cap_out_imu.1@48.768,102.87 48.895,102.743 Cap_out_imu.1@48.768,102.743
NetCap_reg_imu_1: Cap_reg_imu.1 IMU.20 | length 5.8
  Bottom Layer w0.254: IMU.20 48.756,95.135 49.276,94.615 52.578,94.615 Cap_reg_imu.1@52.959,94.996 ; Cap_reg_imu.1@52.959,94.488 Cap_reg_imu.1
NetD_RET_CUR_1: D_RET_CUR.1 REG_DEC.1 V_REG.5 | length 12.6
  Top Layer w0.5: REG_DEC.1 37.465,113.665 37.465,116.078 38.365,116.978 46.219,116.978 46.294,117.053 V_REG.5
NetJTAG_2: JTAG.2 JVCC_VDIV.1 | length 6.3
  Top Layer w0.254: JTAG.2 28.194,94.488 30.226,96.52 JVCC_VDIV.1@33.274,96.52
NetMCU_5: MCU.5 XTAL.2 XTAL_IN.2 | length 25.2
  Top Layer w0.254: MCU.5 70.981,94.5 77.47,88.011 84.709,88.011 85.852,89.154 XTAL_IN.2 85.852,92.202 86.233,92.583 XTAL.2
NetMCU_6: MCU.6 XTAL.1 XTAL_OUT.2 | length 16.1
  Top Layer w0.254: MCU.6 72.005,95 76.708,90.297 XTAL_OUT.2 79.121,92.329 78.613,92.837 XTAL.1
NetOLED_11: OLED.11 OLED_I2C.1 OLED_SPI.1 | length 7.6
  Bottom Layer w0.254: OLED.11 52.806,77.825 54.61,79.629 OLED_SPI.1 OLED_I2C.1@54.61,82.423
NetREG_BYP_1: REG_BYP.1 V_REG.4 | length 8.3
  Top Layer w0.5: REG_BYP.1@42.005,119.221 REG_BYP.1 47.879,118.999 48.194,118.684 V_REG.4
NRST: MCU.7 NRST_VDIV.2 RES_BYP.2 RES_PU.1 | length 105.8
  Top Layer w0.254: NRST_VDIV.2@35.179,93.091 35.687,93.091 36.068,92.71 38.227,92.71 38.354,92.583 v2(38.354,92.329) ; MCU.7 73.402,95.5 RES_PU.1@73.533,95.631 ; RES_PU.1 RES_BYP.2@76.073,95.885 ; v2(75.692,93.98) 75.692,94.234 76.073,94.615 RES_BYP.2@76.073,95.885 ; RES_BYP.2@76.327,95.885 RES_BYP.2@76.073,95.885
  Bottom Layer w0.254: v2(38.354,92.329) 36.068,92.329 29.464,85.725 29.464,73.025 32.639,69.85 64.77,69.85 69.215,74.295 69.215,90.932 72.263,93.98 v2(75.692,93.98)
OLED_RES: MCU.28 OLED.14 OLED_RES_PU.1 RES_BYPASS.2 | length 31.7
  Top Layer w0.254: v2(57.277,96.901) 57.669,96.509 59.949,96.509 MCU.28
  Bottom Layer w0.254: OLED.14 50.706,77.056 48.256,79.506 48.256,81.784 52.578,86.106 57.277,86.106 v2(57.277,96.901)
OLED_SCL: IMU.23 MCU.45 OLED.18 SCL_IMU_PU.2 | length 56.9
  Top Layer w0.254: v2(49.403,85.725) 49.403,84.836 48.387,83.82 48.387,82.042 50.292,80.137 64.897,80.137 66.421,81.661 66.421,88.138 65.258,89.301 MCU.45
  Bottom Layer w0.254: IMU.23 47.256,95.365 48.768,93.853 SCL_IMU_PU.2 48.387,89.027 49.403,88.011 v2(49.403,85.725) 49.403,84.836 46.736,82.169 46.736,79.429 47.906,78.259 OLED.18
OLED_SDA: IMU.24 MCU.46 OLED.19 OLED.20 SDA_IMU_PU.2 | length 60.6
  Top Layer w0.254: v2(44.958,85.598) 44.958,82.574 48.665,78.867 64.643,78.867 66.929,81.153 66.929,88.519 65.758,89.69 MCU.46
  Bottom Layer w0.254: v2(44.958,85.598) 44.958,79.629 46.506,78.081 OLED.20 OLED.19 ; v2@45.339,85.725 45.72,85.725 46.482,86.487 46.482,89.154 46.756,89.428 IMU.24
PWR_BLT: MCU.17 MOS_BLE.1 MOS_DRV_BLE.2 | length 36.5
  Top Layer w0.254: MCU.17 64.758,100.953 66.04,102.235 68.199,102.235 74.549,108.585 74.549,117.856 79.121,122.428 MOS_DRV_BLE.2 80.881,122.192 MOS_BLE.1
PWR_SpO2: MCU.19 MOS_DRV_SpO2_.2 MOS_SpO.1 | length 67.2
  Top Layer w0.254: v1(51.816,125.476) 52.197,125.857 63.5,125.857 68.707,120.65 68.707,104.648 67.437,103.378 65.024,103.378 63.758,102.112 MCU.19 ; v1(52.806,108.331) 52.933,108.204 MOS_SpO.1 55.626,107.315 MOS_DRV_SpO2_.2
  Bottom Layer w0.254: v1(51.816,125.476) 52.07,125.222 52.07,109.067 v1(52.806,108.331)
RX_ICSP: ICSP.3 MCU.31 | length 26.5
  Top Layer w0.254: ICSP.3@44.323,108.839 44.323,100.076 49.399,95 MCU.31
RX_SpO2_EXT: MCU.22 SDA_SPO2_.1 SpO2_.3 SpO2_HDR.3 | length 38.4
  Top Layer w0.254: v1(58.42,110.49) 57.15,111.76 55.499,111.76 53.975,113.284 53.975,124.587 54.483,125.095 56.261,125.095 57.15,124.206 SDA_SPO2_.1 57.15,123.317 58.712,121.755 SpO2_.3 ; SpO2_HDR.3 61.722,106.934 62.258,106.398 MCU.22
  Bottom Layer w0.254: v1(58.42,110.49) 58.674,110.49 58.801,110.617 61.722,107.696 SpO2_HDR.3
RX_UART: "UART SEC.2" MCU.13 UART_RX_PD.2 | length 29.6
  Top Layer w0.254: MCU.13 66.758,99.568 69.85,99.568 76.073,105.791 76.073,112.903 79.248,116.078 80.772,116.078 UART_RX_PD.2@85.09,116.078
SCL_SpO2: MCU.21 SCL_SPO2_.2 SpO2_.2 SpO2_HDR.2 | length 35.1
  Top Layer w0.254: SCL_SPO2_.2@59.055,123.698 59.055,123.444 59.512,122.987 SpO2_.2 ; SCL_SPO2_.2@59.563,123.952 SCL_SPO2_.2 59.309,124.692 59.712,125.095 61.976,125.095 62.738,124.333 62.738,108.966 SpO2_HDR.2 62.758,105.938 MCU.21
SW1: MCU.10 SW_1.1 SW_1.2 | length 15.6
  Top Layer w0.254: MCU.10 70.584,97 74.803,101.219 78.613,101.219 SW_1.1@79.121,100.711
  Top Layer w0.5: SW_1.2 SW_1.1
SW2: MCU.11 SW_2.1 SW_2.2 | length 16.5
  Top Layer w0.254: MCU.11 69.941,97.5 74.676,102.235 77.851,102.235 SW_2.2@79.121,103.505
  Top Layer w0.5: SW_2.2@79.502,103.505 SW_2.2 SW_2.1
TCK: MCU.37 TCK_VDIV.2 | length 50.4
  Top Layer w0.254: 35.179,84.328 35.157,84.35 35.157,85.112 34.798,85.471 27.051,85.471 26.162,86.36 26.162,89.916 26.924,90.678 30.48,90.678 31.623,91.821 36.83,91.821 38.227,90.424 61.084,90.424 MCU.37@61.237,90.577
TCK_Con: JTAG.6 TCK_VDIV.1 | length 5.3
  Top Layer w0.254: JTAG.6 33.147,84.328
TDI: JTDI_VDIV.2 MCU.38 | length 28.7
  Top Layer w0.254: JTDI_VDIV.2@35.052,90.043 35.814,89.281 61.341,89.281 61.758,89.698 MCU.38
TDI_Con: JTAG.4 JTDI_VDIV.1 | length 5.7
  Top Layer w0.254: JTAG.4 32.639,89.408 JTDI_VDIV.1@33.274,90.043
TMS: MCU.34 TMS_VDIV.2 | length 59.3
  Top Layer w0.254: TMS_VDIV.2 35.179,79.375 34.29,78.486 28.448,78.486 25.527,81.407 25.527,92.456 26.289,93.218 29.21,93.218 30.861,94.869 36.449,94.869 37.846,93.472 45.125,93.472 45.153,93.5 MCU.34
TMS_Con: JTAG.7 TMS_VDIV.1 | length 6
  Top Layer w0.254: JTAG.7 32.004,81.788 TMS_VDIV.1@33.274,80.518
TX_ICSP: ICSP.2 MCU.30 | length 23.4
  Top Layer w0.254: ICSP.2@46.863,108.839 46.863,100.711 52.074,95.5 MCU.30
TX_UART: "UART SEC.3" MCU.12 UART_TX_PD.2 | length 27.5
  Top Layer w0.254: MCU.12 69.425,98 77.216,105.791 77.216,112.522 78.232,113.538 80.772,113.538 UART_TX_PD.2@85.217,113.538
USB+: MCU.33 USB.3 | length 34.8
  Top Layer w0.254: USB.3 33.909,107.442 47.351,94 MCU.33
USB-: MCU.32 USB.2 | length 34.9
  Top Layer w0.254: USB.2 34.021,108.092 47.613,94.5 MCU.32
V+_USB: USB.1 V_REG.1 V_REG.3 ZEN_USB.2 | length 30.8
  Top Layer w0.5: USB.1 32.542,108.742 34.544,110.744 34.544,111.5 ; ZEN_USB.2@34.544,114.808 34.544,111.5 ; V_REG.1 45.212,113.796 45.212,112.516 44.196,111.5 ; V_REG.3 49.149,113.923 49.149,112.522 48.127,111.5 44.196,111.5 ; 34.544,111.5 44.196,111.5
VCC: BOOTLOADER.2 cap_dec_imu.1 ICSP.1 IMU.8 IMU.13 J_RES_PU.2 JVCC_VDIV.2 L_PWR.2 MCU.1 MCU.9 MCU.24 MCU.36 MCU.41 MCU.48 MOS_BLE.2 MOS_DRV_BLE.1 MOS_DRV_SpO2_.1 MOS_SpO.2 NTC_CAP.2 OLED.6 OLED.9 OLED.28 OLED_C_STABILITY.1 OLED_I2C.2 OLED_RES_PU.2 RES_PU.2 SCL_IMU_PU.1 SDA_IMU_PU.1 SpO2_HDR.4 THERMORES.1 VOL_REG_CAP_OUT0.2 VOL_REG_CAP_OUT1.2 | length 393.7
  Top Layer w0.254: JVCC_VDIV.2 37.211,96.647 39.37,94.488 v2@44.323,94.488 ; v1(54.483,84.963) 54.483,85.344 v1@54.483,85.471 ; MCU.36 62.948,92.5 63.258,92.19 MCU.41 63.258,88.761 63.881,88.138 64.005,87.267 64.008,87.249 64.008,84.709 BOOTLOADER.2 ; MCU.1@68.049,92.509 66.622,92.509 64.135,94.996 64.135,95.758 64.877,96.5 MCU.9 71.481,96.5 73.025,98.044 73.66,98.044 RES_PU.2@73.787,97.917 ; NTC_CAP.2 NTC_CAP.2@73.025,124.46 ; MOS_DRV_BLE.1@80.391,124.714 MOS_DRV_BLE.1 ; MOS_BLE.2@84.249,124.46 MOS_BLE.2
  Top Layer w0.5: v1(35.052,100.965) 35.179,100.838 JVCC_VDIV.2 ; v1@42.291,125.73 42.846,125.175 42.846,123.999 L_PWR.2@42.799,123.952 ; L_PWR.2 L_PWR.2@42.799,123.952 ; v1(43.942,71.882) 43.942,76.073 44.577,76.708 44.577,77.851 42.672,79.756 42.672,85.598 44.196,87.122 52.705,87.122 v1@54.483,85.344 ; 44.831,77.851 65.024,77.851 67.945,80.772 MCU.1@67.945,92.4 ; ICSP.1 ICSP.1@49.721,108.521 ; MOS_SpO.2@53.787,110.744 53.533,110.49 51.689,110.49 ; v1@54.483,85.471 63.246,85.471 BOOTLOADER.2@64.008,84.709 ; SpO2_HDR.4 59.182,104.648 56.07,101.536 ; 61.087,99.3 58.307,99.3 56.07,101.536 ; 66.929,91.186 67.818,91.186 ; NTC_CAP.2 MOS_DRV_BLE.1@80.391,124.714 ; THERMORES.1 NTC_CAP.2@73.025,124.46 ; MOS_DRV_BLE.1 MOS_BLE.2@84.249,124.46 ; L_PWR.2@42.799,123.952 45.466,123.952 45.72,123.698 VOL_REG_CAP_OUT0.2 VOL_REG_CAP_OUT1.2 50.546,123.698 51.943,122.301 51.943,110.744 51.689,110.49 ; ICSP.1@49.721,108.521 53.594,104.648 53.594,104.013 56.07,101.536 ; ICSP.1@49.721,108.521 51.689,110.49
  Bottom Layer w0.254: OLED_C_STABILITY.1@35.941,71.247 38.799,71.247 40.906,73.354 41.708,73.354 ; 40.906,73.406 OLED.28 ; v1@43.688,71.882 43.18,71.882 41.708,73.354 ; v2(44.704,94.488) 44.704,100.457 45.466,101.219 46.863,101.219 47.256,100.826 IMU.8 ; IMU.13@49.973,99.291 IMU.13 52.471,99.294 52.832,98.933 54.08,98.933 54.719,98.294 57.789,98.294 59.69,96.393 59.69,86.255 60.22,85.725 63.119,85.725 64.008,84.836 BOOTLOADER.2@64.008,84.582 ; OLED_RES_PU.2@50.292,80.264 50.292,81.788 50.927,82.423 52.578,82.423 OLED_I2C.2 52.578,83.058 v1(54.483,84.963) ; SCL_IMU_PU.1@50.546,89.281 50.419,89.408 SCL_IMU_PU.1 53.848,89.408 55.499,91.059 55.499,97.514 54.79,98.224 ; OLED.6 56.306,77.171 56.007,77.47 54.737,77.47 54.206,76.939 OLED.9 54.206,73.891 53.669,73.354 41.708,73.354 ; SpO2_HDR.4 56.769,109.855 56.769,113.538 65.427,122.196 72.622,122.196 73.025,121.793 THERMORES.1@73.025,120.043 ; THERMORES.1 THERMORES.1@73.025,120.043 ; THERMORES.1@73.37,120.388 THERMORES.1@73.025,120.043
  Bottom Layer w0.5: v1(35.052,100.965) 37.592,100.965 39.37,102.743 39.37,123.19 v1(42.037,125.857) ; SDA_IMU_PU.1 44.323,94.107 v2(44.704,94.488) ; BOOTLOADER.2@64.008,84.836 64.008,88.646 76.073,100.711 76.073,106.426 78.359,108.712 81.661,108.712 83.693,110.744 83.693,119.761 82.423,121.031 78.644,121.031 78.001,120.388 THERMORES.1@73.37,120.388
VCC_BLT: "UART SEC.1" MOS_BLE.3 UART_RX_PD.1 UART_TX_PD.1 | length 21.4
  Top Layer w0.254: 80.711,118.679 80.772,118.618 81.026,118.872 ; UART_RX_PD.1@84.836,118.11 UART_RX_PD.1@85.471,118.11 ; UART_TX_PD.1@85.217,111.506 UART_TX_PD.1@85.598,111.887 ; UART_RX_PD.1 UART_RX_PD.1@85.979,118.237 ; UART_RX_PD.1@85.913,118.303 UART_RX_PD.1@85.979,118.237 ; 86.233,118.11 86.487,118.11 ; UART_RX_PD.1@86.233,118.245 86.233,118.237 UART_RX_PD.1@85.979,118.237
  Top Layer w0.5: 81.026,118.872 84.074,118.872 UART_RX_PD.1@84.836,118.11 ; UART_TX_PD.1@85.598,111.887 86.741,111.887 87.376,112.522 87.376,117.221 86.487,118.11 ; MOS_BLE.3 86.614,123.995 86.614,118.618 86.233,118.237
VCC_SpO2: CAP_LED_DEC.1 MOS_SpO.3 SCL_SPO2_.1 SDA_SPO2_.2 SpO2_.4 | length 30.6
  Top Layer w0.254: SDA_SPO2_.2 55.118,122.7 56.025,121.793 57.404,121.793 57.912,121.285 SpO2_.4 57.912,119.507 58.166,119.253 61.595,119.253 ; MOS_SpO.3 57.048,109.093 59.69,109.093 61.595,110.998 61.595,119.253 ; SCL_SPO2_.1@61.341,124.333 SCL_SPO2_.1 61.595,123.444 61.595,119.253
pads on no net: IMU.1 IMU.2 IMU.3 IMU.4 IMU.5 IMU.6 IMU.7 IMU.14 IMU.15 IMU.16 IMU.17 IMU.19 IMU.21 IMU.22 MCU.2 MCU.3 MCU.4 MCU.14 MCU.15 MCU.16 MCU.26 MCU.27 MCU.29 MCU.43 OLED.0 OLED.1 OLED.7 OLED.30 SpO2_.1 SpO2_.5 SpO2_.6 SpO2_.7 SpO2_.8 SpO2_.11 SpO2_.13 SpO2_.14 USB.4 USB.MH1 USB.MH2

## Keep-outs
Keep-Out Layer:
  lines w0.5: 24.638,69.85 24.638,127 88.519,127 88.519,69.215 25.273,69.215 24.638,69.85

## Other copper
Top Layer:
  text "Oximeter V0.1" at 68.834,70.231 h1.52

## Silkscreen, mask and mechanical layers (free items; w line width, h text height)
Top Overlay:
  lines w0.254: 24.892,102.743 51.816,102.743 ; 25.4,69.469 36.83,69.469 ; 36.83,88.138 56.134,88.138 ; 36.83,102.616 36.83,69.469 ; 51.816,126.873 51.816,102.743 ; 56.134,102.743 56.134,88.138 ; 61.087,69.596 61.087,88.138 ; 65.659,126.873 65.659,115.443 68.58,115.443 ; 67.056,69.596 67.056,88.138 ; 75.946,102.743 68.58,102.743 ; 76.073,126.873 76.073,115.443 68.58,115.443 ; 88.265,88.138 75.946,88.138 ; 88.265,108.204 87.503,108.966 75.946,108.966 75.946,88.138 ; 88.265,126.873 88.265,69.469 36.83,69.469 ; 51.816,102.743 68.58,102.743 ; 56.134,88.138 61.087,88.138 ; 61.087,88.138 67.056,88.138 ; 67.056,88.138 75.946,88.138 ; 68.58,102.743 68.58,115.443
  text "TEMP" at 68.072,120.65 h1.52 r90
  text "PWR" at 28.956,116.459 h1.52
  text "SpO2" at 62.357,110.617 h1.52
  text "BLE" at 77.343,109.474 h1.52 r90
  text "ICSP" at 43.18,104.521 h1.52
  text "INT" at 53.721,101.346 h0.75
  text "IMU" at 38.354,99.695 h1.52
  text "ORES" at 56.642,97.917 h0.75
  text "MCU" at 69.469,89.027 h1.52
  text "SCL" at 48.641,83.693 h0.75
  text "SDA" at 43.815,83.566 h0.75
  text "JTAG" at 28.194,77.216 h1.52
  text "OLED" at 47.244,70.739 h1.52
  text "BOOT_0" at 64.135,70.612 h1.52 r90

## Text inside footprints (layer, text, board x,y; h text height)
USB: Mechanical 2 "PCB Edge" at 24.513,108.742 h0.41 r270